# Altium PCB mux_stack_espE_64pin.PcbDoc
Units mil, origin at the board's own origin, x right, y up, seen from the top; angles counter-clockwise.
Board outline 1102.36 x 2362.2 mil, 4 copper layers (Top Layer, GND, POwer, Bottom Layer), stack 23.756 mil thick; 22 components, 91 nets, 255 pads, 117 vias.
Unrouted connection lines stored in the file: 1.
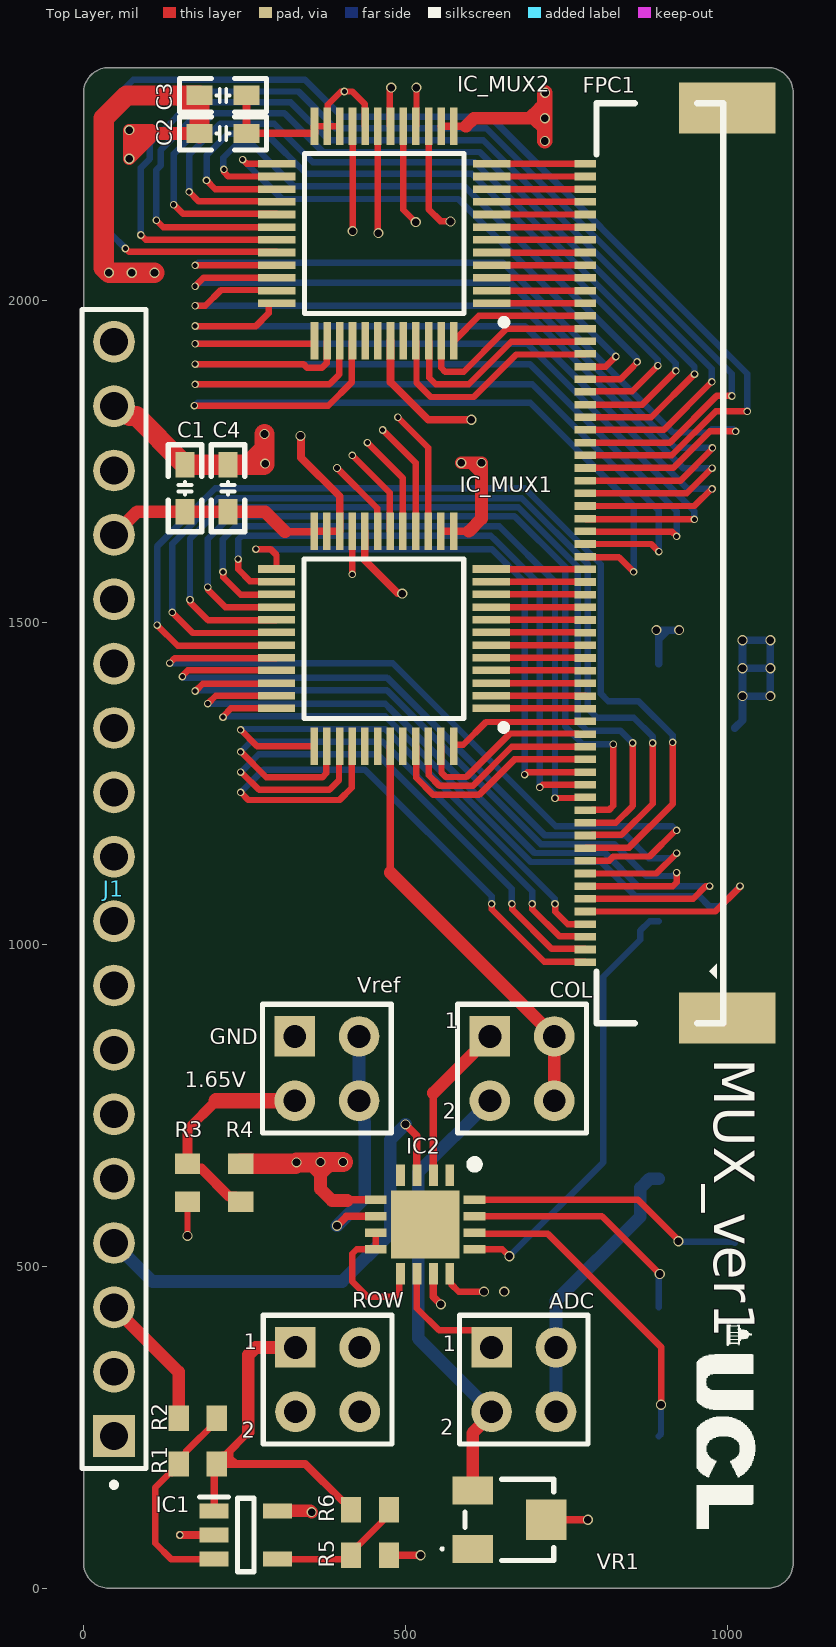
[diagram p0: Top Layer view]
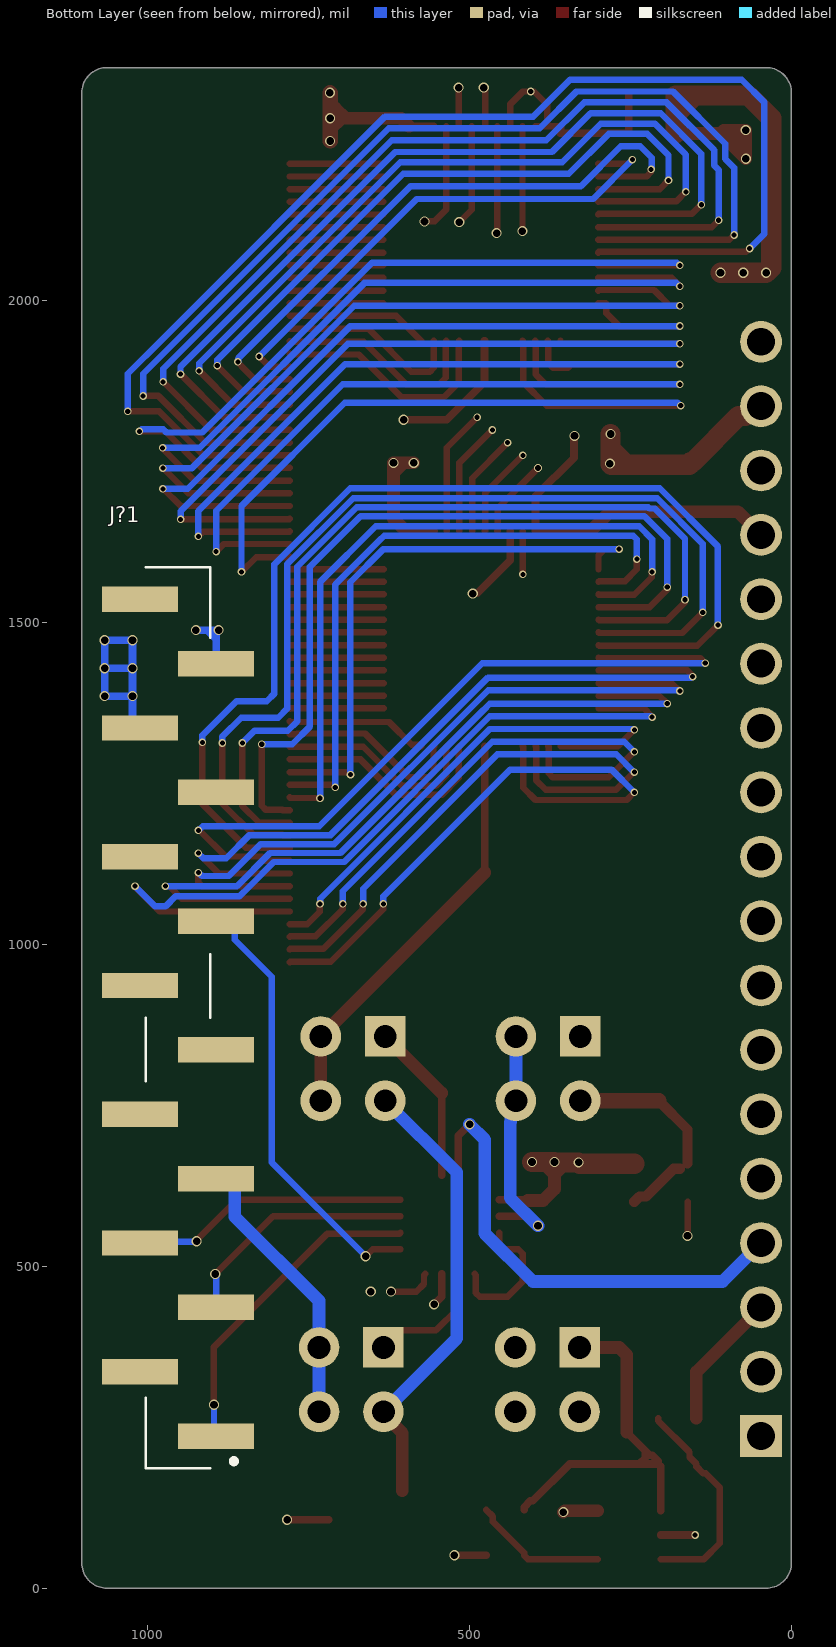
[diagram p1: Bottom Layer view, seen from below]
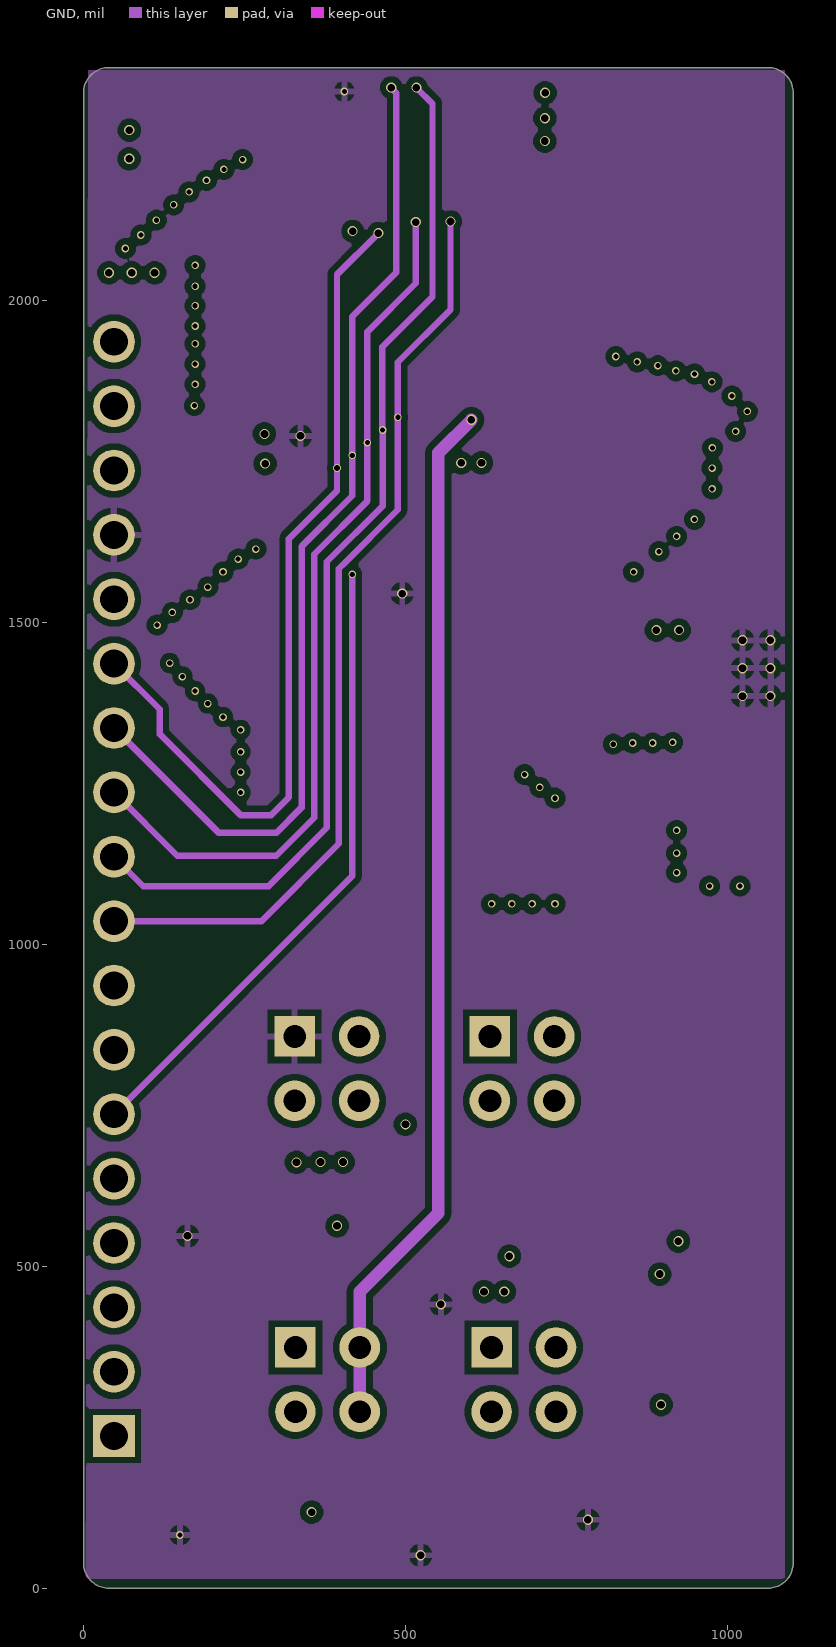
[diagram p2: GND]
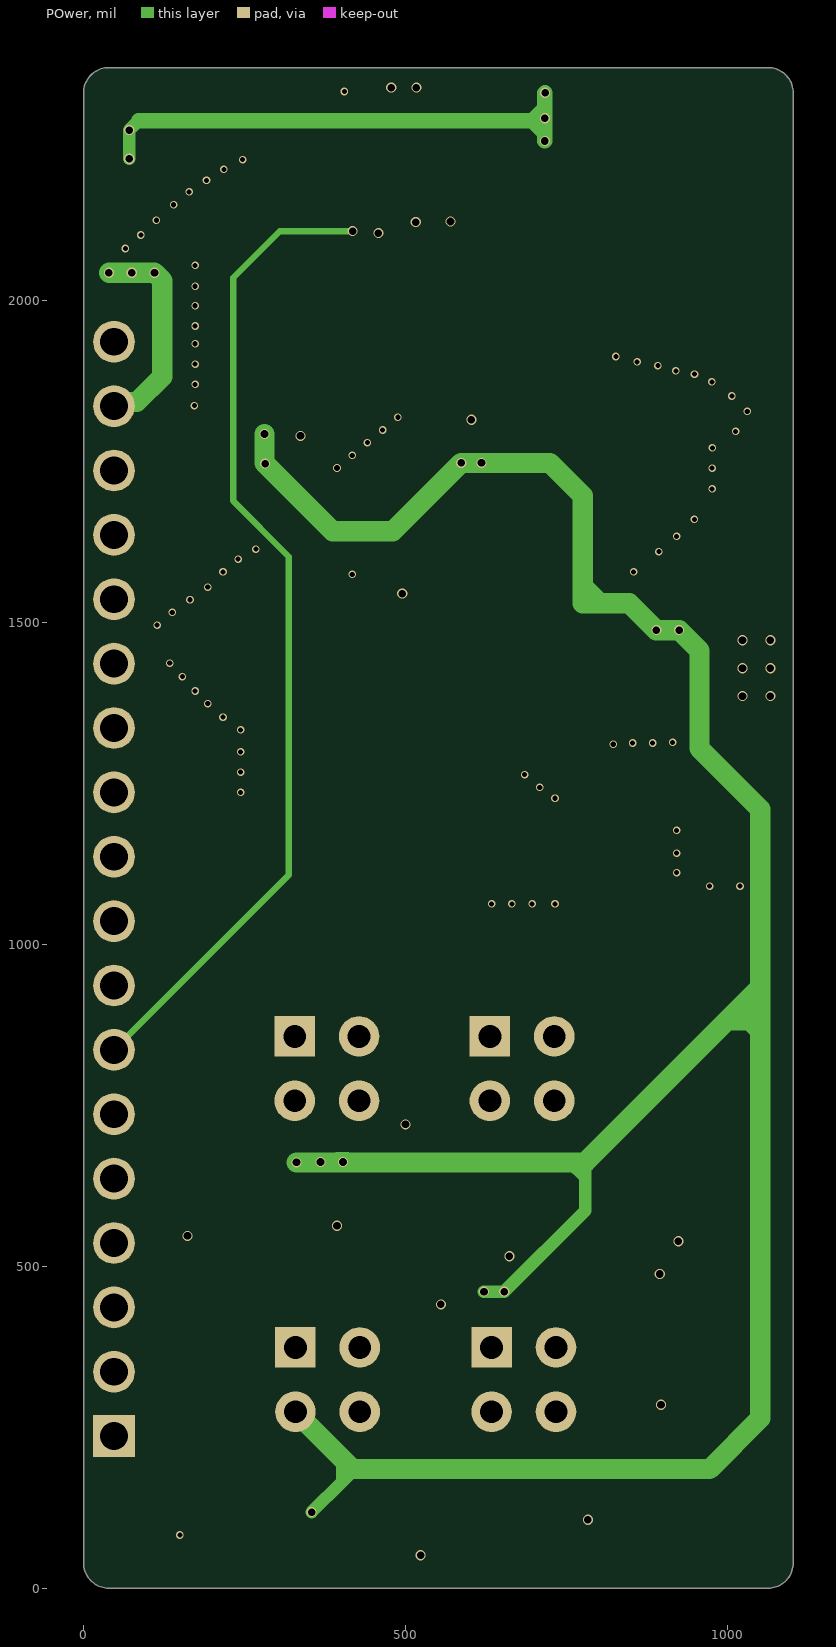
[diagram p3: POwer]

## Layer stack, top to bottom
Top Solder: solder mask 0.4, Solder Resist, Dk 3.5
Top Layer: signal copper 1.4
Dielectric 2: prepreg 2.8, PP-006, Dk 4.1
GND: signal copper 1.378
Dielectric 1: dielectric 12.6, FR-4, Dk 4.8
POwer: signal copper 1.378
Dielectric 3: prepreg 2.8, PP-006, Dk 4.1
Bottom Layer: signal copper 1.4
Bottom Solder: solder mask 0.4, Solder Resist, Dk 3.5

## Board outline
39.37,0 cw(c39.37,39.37) 0,39.37 0,2322.83 cw(c39.37,2322.83) 39.37,2362.2 1062.99,2362.2 cw(c1062.99,2322.83) 1102.36,2322.83 1102.36,39.37 cw(c1062.99,39.37) 1062.99,0

## Design rules (kind name [scope] priority, off if disabled: settings)
Clearance [All] p1: gap=10 ignorepadtopadclearanceinfootprint=FALSE except(0: Arc-Hole Track-Hole SMDPad-Hole THPad-Hole Via-Hole Fill-Hole Poly-Hole Region-Hole Text-Hole; 3.94: Arc-Arc Arc-Track Track-Track; 5: SMDPad-SMDPad; 7.87: Arc-SMDPad Track-SMDPad)
PolygonConnect [All] p1: connectstyle=Relief reliefconductorwidth=10 reliefentries=4 polygonreliefangle="90 Angle" airgapwidth=10
RoutingVias [All] p1: holewidth=28 width=50 viastyle="Through Hole" minholewidth=28 minwidth=50 maxholewidth=28 maxwidth=50
SolderMaskExpansion [All] p1: expansion=4 istentingtop=FALSE
Width [All] p1: maxlimit=78.74 minlimit=10 preferedwidth=10 minimp=50.000000 maximp=50.000000 favimp=50.000000
30 further rules are at their usual default settings.

## Classes and differential pairs
component class mux_stack_espE: C1 C2 FPC1 IC1 IC2 IC_MUX2 J1 J?1 "Left Header" R1 R4 R5 R6 "Right Header" ROW VR1 Vref

## Components (designator, comment, footprint, x,y, rotation, side; value= is the part's Value field where it differs from the comment)
ADC "Header2X2" HDR2.54-LI-2x2P 683.86,324.02 r270 top (schematic designator JP3)
C1 "0.1uF/50V(10%)" C0603_M 157.48,1708.66 r90 top (schematic designator C4)
C2 "0.1uF/50V(10%)" C0603_M 216.54,2259.84 r180 top
C3 "10uF/25V(20%)" C0603_M 216.54,2318.9 r180 top (schematic designator C1)
C4 "10uF/25V(20%)" C0603_M 224.41,1708.66 r90 top (schematic designator C3)
COL "Header2X2" HDR2.54-LI-2x2P 681.1,807.09 r270 top (schematic designator JP4)
FPC1 "8.15A0.064200" PCBComponent_1 734.53,1641.7 r270 top
IC1 "AD8615AUJZ-REEL7" SOT95P280X100-5N 251.97,82.68 r0 top
IC2 "AD8231TCPZ-EP-R7" QFN65P400X400X80-17N-D 530.51,564.96 r270 top
IC_MUX1 "ADG732BSUZ" QFP50P900X900X120-48N 466.54,1474.88 r180 top (schematic designator IC_MUX2)
IC_MUX2 "ADG732BSUZ" QFP50P900X900X120-48N 467.01,2104.33 r180 top (schematic designator IC_MUX1)
J1 "TS-118-T-A-1" SAMTEC_TS-118-T-A-1 47.24,1086.22 r90 top locked (schematic designator "Left Header")
J?1 "61001418221" 61001418221 952.76,886.22 r90 bottom locked (schematic designator J?)
R1 "Resistor 100k +/-1% 0603 100 mW" RESC1608X55X25ML10T15 177.17,192.91 r0 top value=100k
R2 "Resistor 100k +/-1% 0603 100 mW" RESC1608X55X25ML10T15 177.17,263.78 r0 top value=100k (schematic designator R4)
R3 "Resistor 1k +/-1% 0603 100 mW" RESC1608X55X25ML10T15 161.42,629.92 r90 top value=1k (schematic designator R6)
R4 "Resistor 1k +/-1% 0603 100 mW" RESC1608X55X25ML10T15 244.09,629.92 r90 top value=1k (schematic designator R5)
R5 "Resistor 100k +/-1% 0603 100 mW" RESC1608X55X25ML10T15 444.88,51.18 r0 top value=100k (schematic designator R3)
R6 "Resistor 100k +/-1% 0603 100 mW" RESC1608X55X25ML10T15 444.88,122.05 r180 top value=100k (schematic designator R2)
ROW "Header2X2" HDR2.54-LI-2x2P 379.13,324.02 r270 top (schematic designator JP2)
VR1 "3313J-1-103E" 3313J1103E 661.42,106.3 r270 top
Vref "Header2X2" HDR2.54-LI-2x2P 377.95,807.09 r270 top (schematic designator JP?)

## Footprints (in the part's own frame and the unit in brackets; to place one, negate y for a bottom-side part, rotate by r counter-clockwise, add the part's x,y. Pads: shape width x height; smd on the part's side, far side on the other; paste and mask are expansions set on the pad)
3313J1103E [mm]
  rect 1.1x1.6 smd: 1(1.15,-1.45) 3(-1.15,-1.45)
  rect 1.6x1.6 smd: 2(0,1.45)
  silkscreen extent -1.6,-2.7 1.6,1.75, body extent -1.6,-1.75 1.6,1.75, height 2.4
61001418221 [mm]
  rect 1x3 smd: 1(-16.51,-1.5) 2(-13.97,1.5) 3(-11.43,-1.5) 4(-8.89,1.5) 5(-6.35,-1.5) 6(-3.81,1.5) 7(-1.27,-1.5) 8(1.27,1.5) 9(3.81,-1.5) 10(6.35,1.5) 11(8.89,-1.5) 12(11.43,1.5) 13(13.97,-1.5) 14(16.51,1.5)
  silkscreen extent -17.78,-2.3 17.78,1.27, body extent -17.78,-2.9 17.78,2.9, height 9.4
C0603_M [mil] "无极性贴片电容"
  rect 40x30 smd: 1(-36.5,0) 2(36.5,0)
  silkscreen extent -68,-26 68,26, body extent -31,-16 31,16, height 32
HDR2.54-LI-2x2P [mm] "双排排针，2x2脚                        联系卖家 免费查找封装"
  rect 1.6x1.6 hole 0.9: 1(-1.27,-1.27)
  round 1.6 hole 0.9: 2(-1.27,1.27) 3(1.27,-1.27) 4(1.27,1.27)
  silkscreen extent -2.54,-2.54 2.54,2.54, body extent -2.54,-2.54 2.54,2.54, height 8.5
PCBComponent_1 [mm]
  rect 0.3x0.85 smd paste+0 mask+0.05: 1(16.999,1.143) 2(16.499,1.143) 3(15.999,1.143) 4(15.499,1.143) 5(14.999,1.143) 6(14.499,1.143) 7(13.999,1.143) 8(13.499,1.143) 9(12.999,1.143) 10(12.499,1.143) 11(11.999,1.143) 12(11.499,1.143) 13(10.999,1.143) 14(10.499,1.143) 15(9.999,1.143) 16(9.499,1.143) 17(8.999,1.143) 18(8.499,1.143) 19(7.999,1.143) 20(7.499,1.143) 21(6.999,1.143) 22(6.499,1.143) 23(5.999,1.143) 24(5.499,1.143) 25(4.999,1.143) 26(4.499,1.143) 27(3.999,1.143) 28(3.499,1.143) 29(2.999,1.143) 30(2.499,1.143) 31(1.999,1.143) 32(1.499,1.143) 33(0.999,1.143) 34(0.499,1.143) 35(-0.001,1.143) 36(-0.501,1.143) 37(-1.001,1.143) 38(-1.501,1.143) 39(-2.001,1.143) 40(-2.501,1.143) 41(-3.001,1.143) 42(-3.501,1.143) 43(-4.001,1.143) 44(-4.501,1.143) 45(-5.001,1.143) 46(-5.501,1.143) 47(-6.001,1.143) 48(-6.501,1.143) 49(-7.001,1.143) 50(-7.501,1.143) 51(-8.001,1.143) 52(-8.501,1.143) 53(-9.001,1.143) 54(-9.501,1.143) 55(-10.001,1.143) 56(-10.501,1.143) 57(-11.001,1.143) 58(-11.501,1.143) 59(-12.001,1.143) 60(-12.501,1.143) 61(-13.001,1.143) 62(-13.501,1.143) 63(-14.001,1.143) 64(-14.501,1.143)
  rect 2x3.81 smd paste+0 mask+0.05: 65(19.2,6.743) 66(-16.701,6.743)
  silkscreen extent -16.9,1.58 19.4,6.58
QFN65P400X400X80-17N-D [mm]
  rect 0.85x0.35 smd: 1(-1.95,0.975) 2(-1.95,0.325) 3(-1.95,-0.325) 4(-1.95,-0.975) 9(1.95,-0.975) 10(1.95,-0.325) 11(1.95,0.325) 12(1.95,0.975)
  rect 0.35x0.85 smd: 5(-0.975,-1.95) 6(-0.325,-1.95) 7(0.325,-1.95) 8(0.975,-1.95) 13(0.975,1.95) 14(0.325,1.95) 15(-0.325,1.95) 16(-0.975,1.95)
  rect 2.7x2.7 smd: 17(0,0)
  silkscreen extent -2.54,1.79 -2.21,2.11, body extent -2.05,-2.05 2.05,2.05, height 0.8
QFP50P900X900X120-48N [mm]
  rect 1.475x0.3 smd: 1(-4.238,2.75) 2(-4.238,2.25) 3(-4.238,1.75) 4(-4.238,1.25) 5(-4.238,0.75) 6(-4.238,0.25) 7(-4.238,-0.25) 8(-4.238,-0.75) 9(-4.238,-1.25) 10(-4.238,-1.75) 11(-4.238,-2.25) 12(-4.238,-2.75) 25(4.238,-2.75) 26(4.238,-2.25) 27(4.238,-1.75) 28(4.238,-1.25) 29(4.238,-0.75) 30(4.238,-0.25) 31(4.238,0.25) 32(4.238,0.75) 33(4.238,1.25) 34(4.238,1.75) 35(4.238,2.25) 36(4.238,2.75)
  rect 0.3x1.475 smd: 13(-2.75,-4.238) 14(-2.25,-4.238) 15(-1.75,-4.238) 16(-1.25,-4.238) 17(-0.75,-4.238) 18(-0.25,-4.238) 19(0.25,-4.238) 20(0.75,-4.238) 21(1.25,-4.238) 22(1.75,-4.238) 23(2.25,-4.238) 24(2.75,-4.238) 37(2.75,4.238) 38(2.25,4.238) 39(1.75,4.238) 40(1.25,4.238) 41(0.75,4.238) 42(0.25,4.238) 43(-0.25,4.238) 44(-0.75,4.238) 45(-1.25,4.238) 46(-1.75,4.238) 47(-2.25,4.238) 48(-2.75,4.238)
  silkscreen extent -4.85,-3.15 3.15,3.62
RESC1608X55X25ML10T15 [mm] "Chip Resistor, 2-Leads, Body 1.70x0.90mm, IPC Low Density"
  rect 0.8x1 smd: 1(-0.75,0) 2(0.75,0)
  body extent -0.85,-0.45 0.85,0.45, height 0.55
SAMTEC_TS-118-T-A-1 [mm]
  rect 1.65x1.65 hole 1.1: 01(-21.59,0)
  round 1.65 hole 1.1: 02(-19.05,0) 03(-16.51,0) 04(-13.97,0) 05(-11.43,0) 06(-8.89,0) 07(-6.35,0) 08(-3.81,0) 09(-1.27,0) 10(1.27,0) 11(3.81,0) 12(6.35,0) 13(8.89,0) 14(11.43,0) 15(13.97,0) 16(16.51,0) 17(19.05,0) 18(21.59,0)
  silkscreen extent -23.61,-1.27 22.86,1.27
SOT95P280X100-5N [mm]
  rect 1.15x0.6 smd: 1(-1.25,0.95) 2(-1.25,0) 3(-1.25,-0.95) 4(1.25,-0.95) 5(1.25,0.95)
  silkscreen extent -1.83,-1.45 0.33,1.5, body extent -1.4,-1.45 1.4,1.45, height 1

## Part data
ADC COL ROW Vref: library part "Header 2X2", "2*2P接插件", BOM名称=2*2P接插件, 版权归属="封装库来自淘宝 ID：黄晶宝石"
C1 C2 C3 C4: library part C, "贴片电容/MLCC电容", BOM名称=无极性贴片电容, 当前库版本V2024.2.3 @淘宝卖家:黄晶宝石=最新版本发布https://item.taobao.com/item.htm?id=566775463719, 联系下单店铺卖家 免费帮你查找封装="联系下单店铺卖家 免费技术指导"
FPC1: JLCPCB Part Class="Extended Part", LCSC Part Name="翻盖式 下接 P数:64P 间距:0.5mm", Manufacturer=DIANWEI(钿威科技), Add into BOM=yes, Contact Plating=Gold, Contact Type="Bottom Contact", Convert to PCB=yes, Datasheet=https://atta.szlcsc.com/upload/public/pdf/source/20240226/9B0E964ABAD9EBDCC7FF6472C3CD9B36.pdf, Device=8.15A0.064200, Height Above Board=1.8mm, Locking Feature=Clamshell, Manufacturer Part=8.15A0.064200, Number of Contacts=64P, Pitch=0.5mm, Supplier=LCSC, Supplier Footprint=SMD,P=0.5mm,卧贴, Supplier Part=C20626047, Symbol=8.15A0.064200
IC1: "Integrated Circuit", Manufacturer_Name="Analog Devices", Mouser Part Number=584-AD8615AUJZ-R7, Arrow Part Number=AD8615AUJZ-REEL7, Arrow Price/Stock=https://www.arrow.com/en/products/ad8615aujz-reel7/analog-devices?utm_currency=USD&region=europe, Datasheet Link=http://www.farnell.com/datasheets/1841629.pdf, Height=1mm, Manufacturer_Part_Number=AD8615AUJZ-REEL7, Mouser Price/Stock=https://www.mouser.co.uk/ProductDetail/Analog-Devices/AD8615AUJZ-REEL7?qs=%2FtpEQrCGXCyHRrprFEn%2Fog%3D%3D
IC2: "Integrated Circuit", Manufacturer_Name="Analog Devices", Mouser Part Number=584-AD8231TCPZ-EP-R7, Arrow Part Number=AD8231TCPZ-EP-R7, Arrow Price/Stock=https://www.arrow.com/en/products/ad8231tcpz-ep-r7/analog-devices?region=nac, Datasheet Link=https://www.analog.com/media/en/technical-documentation/data-sheets/AD8231-EP.pdf, Height=0.8mm, Manufacturer_Part_Number=AD8231TCPZ-EP-R7, Mouser Price/Stock=https://www.mouser.co.uk/ProductDetail/Analog-Devices/AD8231TCPZ-EP-R7?qs=%2FtpEQrCGXCwVvPTzyZftPQ%3D%3D
IC_MUX1 IC_MUX2: "Integrated Circuit", Manufacturer_Name="Analog Devices", Mouser Part Number=584-ADG732BSUZ, Arrow Part Number=ADG732BSUZ, Arrow Price/Stock=https://www.arrow.com/en/products/adg732bsuz/analog-devices?region=europe, Datasheet Link=https://datasheet.datasheetarchive.com/originals/distributors/Datasheets-4/DSA-69835.pdf, Height=1.2mm, Manufacturer_Part_Number=ADG732BSUZ, Mouser Price/Stock=https://www.mouser.co.uk/ProductDetail/Analog-Devices/ADG732BSUZ?qs=BpaRKvA4VqFZhnJK9M1XMA%3D%3D
J1: library part CMP-002-00076-1, "HEADER, 2.54MM, THOUGH HOLE VERTICAL, 18 POSITION; Connector Systems:Board-to-Board; Pitch Spacing:2.54mm; No. of Rows:1Rows; No. of Contacts:18Contacts; Contact Termination Type:Through Hole; Product Range:TS Series; Gender:Header RoHS Compliant: Yes", Case/Package=None, Availability="In Stock", Check_prices=https://www.snapeda.com/parts/TS-118-T-A-1/Samtec/view-part/?ref=eda, Component Type=Standard, Design Item ID=TS-118-T-A-1, MF=Samtec, MP=TS-118-T-A-1, Pins=18, Price=None, Purchase-URL=https://pricing.snapeda.com/search/part/TS-118-T-A-1/?ref=eda, SnapEDA_Link=https://www.snapeda.com/parts/TS-118-T-A-1/Samtec/view-part/?ref=snap, Source=TS-118-T-A-1.SchLib
J?1: "Connector", Manufacturer_Name="Wurth Elektronik", Mouser Part Number=710-61001418221, Datasheet Link=https://componentsearchengine.com/Datasheets/1/61001418221.pdf, Height=9.3mm, Manufacturer_Part_Number=61001418221, Mouser Price/Stock=https://www.mouser.co.uk/ProductDetail/Wurth-Elektronik/61001418221?qs=PhR8RmCirEZbaE9NVx%2FAsQ%3D%3D
R1 R2 R5 R6: library part CMP-009-00023-5, "Chip Resistor, 100 KOhm, +/- 1%, 0.1 W, -55 to 155 degC, 0603 (1608 Metric)", Case/Package=0603, Max Operating Temperature=155°C, Min Operating Temperature=-55°C, Power=100mW, Tolerance=1%, Voltage Rating=50V, Mounting Technology=SM, Pins=2, RoHS Compliant=True
R3 R4: library part CMP-009-00014-5, "Chip Resistor, 1 KOhm, +/-1%, 0.1 W, -55 to 155 degC, 0603 (1608 Metric)", Case/Package=0603, Max Operating Temperature=155°C, Min Operating Temperature=-55°C, Power=100mW, Tolerance=1%, Voltage Rating=50V, Mounting Technology=SM, Pins=2, RoHS Compliant=True
VR1: "Variable Resistor", Manufacturer_Name=Bourns, Mouser Part Number=652-3313J-1-103E, Arrow Part Number=3313J-1-103E, Arrow Price/Stock=https://www.arrow.com/en/products/3313j-1-103e/bourns?region=nac, Datasheet Link=https://www.bourns.com/docs/Product-Datasheets/3313.pdf, Height=2.4mm, Manufacturer_Part_Number=3313J-1-103E, Mouser Price/Stock=https://www.mouser.co.uk/ProductDetail/Bourns/3313J-1-103E?qs=oM%2FE6%2FUWOpSJWTaqAX%252Bm%2Fw%3D%3D

## Via types
v1: diameter 11.81, hole 7.87, Top Layer to Bottom Layer, 71 vias
v2: diameter 15.75, hole 11.81, Top Layer to Bottom Layer, 45 vias
v3: diameter 11.81, hole 9.84, Top Layer to Bottom Layer, 1 vias

## Nets (pads, with @x,y where several pads share a name; then routed paths per layer and width w, separated by ;. In a path a pad name is that pad's centre, name@x,y a point inside that pad or via, vN(x,y) a via of type N, cw(c..) or ccw(c..) an arc to the next point about the centre after c; other vN are vias at no path point)
1.65V: R3.2 R4.1 Vref.3 | length 330.2
  Top Layer w15.75: R3.2 161.42,712.6 205.91,757.09 ; R3.2@173.23,651.57 183.07,651.57 226.38,608.27 236.22,608.27 R4.1
  Top Layer w23.62: 205.91,757.09 Vref.3
3.3V: C1.2 C2.2 C3.2 C4.2 IC1.5 IC2.5 IC2.12 IC_MUX1.13 IC_MUX1.14 IC_MUX2.13 IC_MUX2.14 J1.17 J?1.13 R4.2 ROW.3 | length 7880.8
  Top Layer w10: IC2.12 570.79,486.3 570.79,472.52 582.68,460.63 v2(622.05,460.63)
  Top Layer w11.81: 409.45,602.36 410.43,603.35 IC2.5 ; IC_MUX1.14 IC_MUX1.13 598.43,1641.73 ; IC_MUX2.14 IC_MUX2.13 594.02,2271.18
  Top Layer w19.68: v2(70.87,2220.47) 110.24,2259.84 C2.2 ; v2@71,2220.61 v2(71,2265) ; 90.55,2245.45 v2(71,2265) ; 105.08,2265 v2(71,2265) ; IC1.5 352.36,120.08 v2(354.33,118.11) ; 349.06,661.42 368,642.48 387,661.48 387,662 ; v2(368,662) 368,620.19 385.83,602.36 409.45,602.36 ; v2(586.61,1748.03) v2(618.11,1748.03) 618.11,1661.42 598.43,1641.73 ; 594.02,2271.18 606.3,2283.46 v2(716.54,2283.46) ; 602.36,1748.03 618.11,1732.28 ; 693,2283.46 708.75,2299.21 716.54,2299.21 ; 698.82,2283.46 716.54,2265.75
  Top Layer w23.62: v2(716.54,2248.03) v2(716.54,2283.46) 716.54,2314.96 716.54,2322.54 v2(717,2323)
  Top Layer w31.5: J1.17 56.3,1836.22 71.59,1820.93 81.71,1820.93 153.23,1749.41 156.73,1749.41 157.48,1748.67 157.48,1745.91 158.23,1745.16 C4.2 280.16,1745.16 281,1746 v2(281,1793) ; v2(110.24,2043.31) v2(74.8,2043.31) v2(39.37,2043.31) 31.5,2051.18 31.5,2263.78 31.5,2283.5 66.9,2318.9 86.61,2318.9 118.11,2318.9 C3.2 C2.2 ; 150.51,2318.9 180.04,2289.37 ; R4.2 v2@328.74,659.45 ; 260,1748.5 281,1769.5 ; v2(330.71,661.42) 367.42,661.42 v2(368,662) v2(403,662)
  POwer w19.68: v2@71,2220.61 v2(71,2265) 85.53,2279.53 ; v2(354.33,118.11) 401.97,165.75 ; 401.97,201.18 401.97,165.75 ; 418.11,185.04 418.11,181.89 401.97,165.75 ; v2(622.05,460.63) v2(653.54,460.63) 779.53,586.61 779.53,637.8 ; 755.91,661.42 779.53,637.8 ; 779.53,661.42 779.53,637.8
  POwer w23.62: 85.53,2279.53 200.79,2279.53 716.54,2279.53 v2(716.54,2248.03) ; 716.54,2263.78 712.6,2263.78 696.85,2279.53 716.54,2299.21 ; v2(716.54,2283.46) 716.54,2314.96 716.54,2322.54 v2(717,2323)
  POwer w31.5: v2(39.37,2043.31) v2(74.8,2043.31) v2(110.24,2043.31) 122.05,2031.5 122.05,1881.89 82.78,1842.62 53.65,1842.62 J1.17 ; v2(281,1793) 281,1748 v2(282,1747) 387.27,1641.73 405.51,1641.73 480.32,1641.73 v2(586.61,1748.03) v2(618.11,1748.03) 724.41,1748.03 775.59,1696.85 775.59,1530.1 847.85,1530.1 v2(889.76,1488.19) v2(925.2,1488.19) 956.69,1456.69 956.69,1304.61 1051.34,1209.96 1051.34,933.23 ; ROW.3 418.11,185.04 972.44,185.04 1051.34,263.94 1051.34,933.23 ; v2(330.71,661.42) 362.2,661.42 393.7,661.42 ; v2@401.64,662 394.28,662 ; v2(403,662) 394.28,662 ; v2@409,662 394.28,662 ; 775.59,1556.51 802,1530.1 ; 1000,881.89 1035.59,881.89 ; 1019.84,897.64 1051.34,866.14 ; 393.7,661.42 779.53,661.42 1051.34,933.23 ; 393.7,661.42 394.28,662
  Bottom Layer w11.81: J?1.13 893.7,1483.19 889.76,1487.12 v2(889.76,1488.19) v2(925.2,1488.19) ; 893.7,1476.38 895.67,1476.38 907.48,1488.19
A0: IC_MUX1.15 IC_MUX2.15 J1.09 | length 1805.4
  Top Layer w10: v1(488.19,1818.9) 535.43,1771.65 IC_MUX1.15 ; IC_MUX2.15 535.91,2142.09 554.33,2123.67 569.33,2123.67 v2(570,2123)
  GND w10: J1.09 276.38,1036.22 396.42,1156.26 396.42,1583.46 406.3,1593.34 488.19,1675.23 v1(488.19,1818.9) 488.19,1904.19 570,1986 v2(570,2123)
A1: IC_MUX1.16 IC_MUX2.16 J1.10 | length 1854.1
  Top Layer w10: v1(464.57,1799.21) 515.75,1748.03 IC_MUX1.16 ; IC_MUX2.16 517.13,2272.09 517.13,2330.87 v2(517,2331)
  GND w10: J1.10 92.91,1090.55 287.4,1090.55 377.95,1181.1 377.95,1594.49 464.57,1681.1 v1@464.57,1798.72 ; v1(464.57,1799.21) 464.57,1799.7 464.17,1800.1 464.17,1928.17 542,2006 542,2306 v2(517,2331)
A2: IC_MUX1.17 IC_MUX2.17 J1.11 | length 1684.1
  Top Layer w10: v1(440.94,1779.53) 496.06,1724.41 IC_MUX1.17 ; IC_MUX2.17 496.54,2141.46 v2(516,2122)
  GND w10: J1.11 145.67,1137.8 299.21,1137.8 358.27,1196.85 358.27,1606.3 440.94,1688.98 v1(440.94,1779.53) ; v1@440.94,1780.02 440.94,1951.94 516,2027 v2(516,2122)
A3: IC_MUX1.18 IC_MUX2.18 J1.12 | length 1761.1
  Top Layer w10: v1(417.32,1759.84) 475.47,1701.69 475.47,1642.64 IC_MUX1.18 ; IC_MUX2.18 475.94,2272.09 475.94,2327.39 478,2329.44 v2(478,2331)
  GND w10: J1.12 210.24,1173.23 299.21,1173.23 338.58,1212.6 338.58,1618.11 417.32,1696.85 v1(417.32,1759.84) ; v1@417.32,1760.33 417.32,1975.32 486,2044 486,2322.27 478,2330.27 v2(478,2331)
A4: IC_MUX1.19 IC_MUX2.19 J1.13 | length 1627.8
  Top Layer w10: v3(393.7,1740.16) 456.33,1677.53 456.33,1642.09 IC_MUX1.19 ; IC_MUX2.19 457.17,2105.83 v2(458,2105)
  GND w10: J1.13 118.11,1365.35 118.11,1326.77 243.89,1200.99 291.54,1200.99 318.87,1228.32 318.87,1629.9 393.7,1704.72 v3(393.7,1740.16) ; v3@393.7,1740.65 393.7,2040.7 v2(458,2105)
ADC_Channel_0: ADC.2 ADC.4 J?1.5 | length 436.7
  Bottom Layer w19.68: ADC.4 ADC.2 733.86,446.46 864.87,577.47 864.87,621.54 879.56,636.22 J?1.5
DAC1: J1.03 R2.1 | length 214
  Top Layer w19.68: J1.03 147.64,335.83 R2.1
DAC2: IC2.3 J1.04 | length 750.1
  Top Layer w11.81: v2(500,720.47) 517.72,702.76 IC2.3
  Bottom Layer w19.68: J1.04 107.09,476.38 401.57,476.38 476.38,551.18 476.38,696.85 v2(500,720.47)
GND: C1.1 C2.1 C3.1 C4.1 IC1.2 IC2.11 IC_MUX1.20 IC_MUX1.22 IC_MUX1.23 IC_MUX1.24 IC_MUX2.20 IC_MUX2.22 IC_MUX2.23 IC_MUX2.24 J1.15 J?1.12 R3.1 R5.2 VR1.2 Vref.1 | length 1665.1
  Top Layer w10: v2(161.42,547.24) R3.1 ; IC_MUX2.24 IC_MUX2.23 ; IC_MUX2.23@377.95,2271.65 IC_MUX2.23 ; IC_MUX2.22 IC_MUX2.23 ; IC_MUX2.20 436.57,2272.09 436.57,2305.55 417.12,2325 v1(405,2325) 404.65,2324.65 399.65,2324.65 379.33,2304.33 379.33,2272.09 IC_MUX2.23
  Top Layer w11.81: v1(149.61,82.68) IC1.2 ; C3.1 C2.1 358.74,2259.84 IC_MUX2.24 ; 313,1641 358.27,1641 IC_MUX1.24 IC_MUX1.23 IC_MUX1.22 397.64,1696.36 337.75,1756.25 337.75,1789.25 v2(337,1790) ; IC_MUX1.20 437.01,1596.99 488.25,1545.75 494.25,1545.75 v2(495,1545) ; R5.2 v2(523.62,51.18) ; IC2.11 543.31,452.76 v2(555.12,440.94) ; VR1.2 v2(783.46,106.3)
  Top Layer w19.68: J1.15@47.26,1636.22 83.2,1672.16 C1.1 C4.1 281.84,1672.16 313,1641
  Bottom Layer w11.81: J?1.12 1023.62,1348.03 v2(1023.62,1385.83) ; v2(1023.62,1385.83) v2(1066.93,1385.83) v2(1066.93,1429.13) ; v2(1023.62,1385.83) v2(1023.62,1429.13) ; v2(1023.62,1429.13) v2(1023.62,1472.44) v2(1066.93,1472.44) v2(1066.93,1429.13) ; v2(1023.62,1429.13) v2(1066.93,1429.13)
IA_A0: IC2.14 J?1.1 | length 503.6
  Top Layer w10: IC2.14 609.17,550.28 721.38,550.28 897.64,374.02 897.64,285.64 v2(897,285)
  Bottom Layer w10: J?1.1 897,239.52 v2(897,285)
IA_A1: IC2.15 J?1.3 | length 377.2
  Top Layer w10: IC2.15 805.24,577.76 v2(895,488)
  Bottom Layer w10: J?1.3 893.7,485.15 895,486.44 v2(895,488)
IA_A2: IC2.16 J?1.4 | length 433.2
  Top Layer w10: IC2.16 861.22,603.35 921.13,543.44 924,540.56 v2(924,539)
  Bottom Layer w10: v2(924,539) 925,538 1010.03,538 J?1.4
IA_CS: IC2.13 J?1.9 | length 683.6
  Top Layer w10: IC2.13 650.59,526.57 v2(661.42,515.75)
  Bottom Layer w10: v2(661.42,515.75) 807.09,661.42 807.09,949.61 864.87,1007.39 864.87,1021.54 879.56,1036.22 J?1.9
Iout: IC1.1 R1.2 R6.2 ROW.1 | length 609.4
  Top Layer w11.81: IC1.1 202.76,188.98 R1.2 ; 227.36,213.58 227.36,201.77 236.22,192.91 ; 255.91,242.13 220.47,206.69 216.54,206.69 206.69,196.85 R1.2 ; R6.2 415.35,125.98 405.51,135.83 401.57,135.83 344.49,192.91 R1.2
  Top Layer w19.68: 255.91,242.13 255.91,362.48 267.44,374.02 ROW.1
MUX_COL_OUT: COL.2 COL.4 IC_MUX1.43 | length 656.5
  Top Layer w11.81: 476.38,1111.81 IC_MUX1.43
  Top Layer w19.68: 476.38,1111.81 COL.2 COL.4
MUX_COL_OUT_1: COL.1 IC2.2 | length 251.7
  Top Layer w11.81: IC2.2 543.31,769.29
  Top Layer w19.68: 543.31,769.29 COL.1
MUX_COL_OUT_2: ADC.3 COL.3 VR1.3 | length 711.2
  Top Layer w19.68: VR1.3 604.33,240.83 633.86,270.36 ADC.3
  Bottom Layer w19.68: COL.3 519.68,645.67 519.68,388.19 ADC.3
MUX_COL_S1: FPC1.32 IC_MUX1.12 | length 146.3
  Top Layer w10: IC_MUX1.12 779.06,1583.15 FPC1.32
MUX_COL_S2: FPC1.31 IC_MUX1.11 | length 146.3
  Top Layer w10: IC_MUX1.11 779.06,1563.46 FPC1.31
MUX_COL_S3: FPC1.30 IC_MUX1.10 | length 146.3
  Top Layer w10: IC_MUX1.10 779.06,1543.78 FPC1.30
MUX_COL_S4: FPC1.29 IC_MUX1.9 | length 146.3
  Top Layer w10: IC_MUX1.9 779.06,1524.09 FPC1.29
MUX_COL_S5: FPC1.28 IC_MUX1.8 | length 146.3
  Top Layer w10: IC_MUX1.8 779.06,1504.41 FPC1.28
MUX_COL_S6: FPC1.27 IC_MUX1.7 | length 146.3
  Top Layer w10: IC_MUX1.7 779.06,1484.72 FPC1.27
MUX_COL_S7: FPC1.26 IC_MUX1.6 | length 146.3
  Top Layer w10: IC_MUX1.6 779.06,1465.04 FPC1.26
MUX_COL_S8: FPC1.25 IC_MUX1.5 | length 146.3
  Top Layer w10: IC_MUX1.5 779.06,1445.35 FPC1.25
MUX_COL_S9: FPC1.24 IC_MUX1.4 | length 146.3
  Top Layer w10: IC_MUX1.4 779.06,1425.67 FPC1.24
MUX_COL_S10: FPC1.23 IC_MUX1.3 | length 146.3
  Top Layer w10: IC_MUX1.3 779.06,1405.98 FPC1.23
MUX_COL_S11: FPC1.22 IC_MUX1.2 | length 146.3
  Top Layer w10: IC_MUX1.2 779.06,1386.3 FPC1.22
MUX_COL_S12: FPC1.21 IC_MUX1.1 | length 146.3
  Top Layer w10: IC_MUX1.1 779.06,1366.61 FPC1.21
MUX_COL_S13: FPC1.20 IC_MUX1.48 | length 221.5
  Top Layer w10: IC_MUX1.48 574.8,1309.42 575.71,1310.32 589.85,1310.32 625.09,1345.56 778.63,1345.56 FPC1.20
MUX_COL_S14: FPC1.19 IC_MUX1.47 | length 296.2
  Top Layer w10: IC_MUX1.47 556.02,1307.13 556.02,1266.84 562.7,1260.16 594.8,1260.16 662.32,1327.68 767.8,1327.68 768.7,1326.78 FPC1.19
MUX_COL_S15: FPC1.18 IC_MUX1.46 | length 320.8
  Top Layer w10: IC_MUX1.46 536.34,1307.13 536.34,1262.87 552.99,1246.22 604.49,1246.22 665.36,1307.09 FPC1.18
MUX_COL_S16: FPC1.17 IC_MUX1.45 | length 346.2
  Top Layer w10: IC_MUX1.45 516.65,1307.13 516.65,1258.94 543.31,1232.28 614.17,1232.28 669.3,1287.41 FPC1.17
MUX_COL_S17: FPC1.16 IC_MUX1.25 | length 891.7
  Top Layer w10: v1(267.72,1614.17) 290.38,1614.17 299.68,1604.86 IC_MUX1.25 ; v1(685.04,1263.78) 685.53,1263.78 689.47,1267.72 FPC1.16
  Bottom Layer w10: v1(267.72,1614.17) 633.86,1614.17 685.39,1562.65 685.39,1264.13 v1(685.04,1263.78)
MUX_COL_S18: FPC1.15 IC_MUX1.26 | length 1003.9
  Top Layer w10: v1(240.16,1598.43) 240.16,1582.68 258.46,1564.37 298.78,1564.37 IC_MUX1.26 ; v1(708.66,1244.09) 709.15,1244.09 713.1,1248.04 FPC1.15
  Bottom Layer w10: v1(240.16,1598.43) 240.16,1629.22 246.02,1635.08 632.64,1635.08 639.61,1628.11 ; 639.63,1628.11 708.66,1559.08 v1(708.66,1244.09)
MUX_COL_S19: FPC1.14 IC_MUX1.27 | length 1097.2
  Top Layer w10: v1(216.54,1578.74) 216.88,1578.39 216.88,1570.52 243.98,1543.42 299.32,1543.42 IC_MUX1.27 ; v1(732.28,1227.13) 732.6,1227.45 778.63,1227.45 FPC1.14
  Bottom Layer w10: v1(216.54,1578.74) 216.19,1579.09 216.19,1629.16 236.63,1649.61 645.67,1649.61 732.28,1562.99 v1(732.28,1227.13)
MUX_COL_S20: FPC1.13 IC_MUX1.28 | length 1275.1
  Top Layer w10: v1(192.91,1555.12) 193.26,1554.77 193.26,1550.83 220,1524.09 IC_MUX1.28 ; FPC1.13 790.36,1208.67 791.26,1209.57 816.98,1209.57 822.83,1215.43 v1(822.83,1311.02)
  Bottom Layer w10: v1(192.91,1555.12) 192.91,1629.92 228.35,1665.35 669.32,1665.35 748.03,1586.64 748.03,1338.58 775.59,1311.02 v1(822.83,1311.02)
MUX_COL_S21: FPC1.12 IC_MUX1.29 | length 1426.9
  Top Layer w10: v1(165.35,1535.43) 165.7,1535.09 165.7,1531.15 193.35,1503.5 298.78,1503.5 IC_MUX1.29 ; FPC1.12 779.64,1189.09 826.89,1189.09 853,1215.2 v1(853,1313)
  Bottom Layer w10: v1(165.35,1535.43) 165.35,1629.97 212.55,1677.17 220.45,1677.17 222.57,1679.29 675.09,1679.29 767.72,1586.66 767.72,1346.46 782.24,1331.93 834.07,1331.93 v1@852.65,1313.35
MUX_COL_S22: FPC1.11 IC_MUX1.30 | length 1571.6
  Top Layer w10: v1(137.8,1515.75) 169.72,1483.82 298.78,1483.82 IC_MUX1.30 ; FPC1.11 790.36,1169.3 791.26,1170.2 835.55,1170.2 884,1218.65 v1(884,1313)
  Bottom Layer w10: v1(137.8,1515.75) 137.8,1622.12 208.59,1692.91 216.49,1692.91 216.8,1693.23 680.86,1693.23 783.46,1590.63 783.46,1366.14 797.4,1352.2 854.8,1352.2 884,1323 v1(884,1313)
MUX_COL_S23: FPC1.10 IC_MUX1.31 | length 1706.9
  Top Layer w10: v1(114.17,1496.06) 146.1,1464.13 298.78,1464.13 IC_MUX1.31 ; FPC1.10 780.43,1150.51 796,1150.51 847.39,1150.52 915,1218.12 v1(915,1314)
  Bottom Layer w10: v1(114.17,1496.06) 114.17,1618.21 204.63,1708.66 685.14,1708.66 803.15,1590.65 803.15,1389.76 814.96,1377.95 862.05,1377.95 915,1325 v1(915,1314)
MUX_COL_S24: FPC1.9 IC_MUX1.32 | length 1225.1
  Top Layer w10: v1(133.86,1437.01) 141.3,1444.45 298.78,1444.45 IC_MUX1.32 ; FPC1.9 816.28,1129.92 822.94,1136.58 878.97,1136.58 919.2,1176.82 920.91,1176.82 v1(921.26,1177.17)
  Bottom Layer w10: v1@134.35,1437.01 480.32,1437.01 733.5,1183.82 749.25,1183.82 914.5,1183.82 921.15,1177.17 v1(921.26,1177.17)
MUX_COL_S25: FPC1.8 IC_MUX1.33 | length 1193.5
  Top Layer w10: v1(153.54,1416.1) 153.89,1416.45 153.89,1417.67 161.89,1425.67 IC_MUX1.33 ; FPC1.8 889.77,1110.24 v1(921.26,1141.73)
  Bottom Layer w10: v1(153.54,1416.1) 154.03,1416.1 154.94,1415.2 155.73,1415.2 156.32,1414.61 471.25,1414.61 715.97,1169.88 743.48,1169.88 755.02,1169.88 841.93,1169.88 877.95,1133.86 913.39,1133.86 v1(921.26,1141.73)
MUX_COL_S26: FPC1.7 IC_MUX1.34 | length 1161
  Top Layer w10: v1(173.23,1393.7) 173.72,1393.7 185.1,1405.08 298.78,1405.08 IC_MUX1.34 ; FPC1.7 915.4,1090.55 921.26,1096.41 v1(921.26,1111.46)
  Bottom Layer w10: v1(173.23,1393.7) 173.72,1393.7 174.94,1394.92 471.22,1394.92 710.2,1155.95 824.37,1155.95 874.02,1106.3 915.61,1106.3 920.77,1111.46 v1(921.26,1111.46)
MUX_COL_S27: FPC1.6 IC_MUX1.35 | length 1209
  Top Layer w10: v1@193.26,1374.36 205.2,1386.3 IC_MUX1.35 ; FPC1.6 946.9,1070.87 966.23,1090.2 972.09,1090.2 v1(972.44,1090.55)
  Bottom Layer w10: v1(192.91,1374.02) 468.5,1374.02 478.19,1364.33 700.54,1142.01 809.91,1142.01 861.37,1090.55 927.55,1090.55 927.71,1090.38 945.03,1090.38 945.2,1090.55 v1@971.95,1090.55
MUX_COL_S28: FPC1.5 IC_MUX1.36 | length 1285.6
  Top Layer w10: v1(216.54,1353.11) 216.88,1353.46 216.88,1354.68 228.82,1366.61 IC_MUX1.36 ; FPC1.5 981.43,1051.19 1018.78,1088.54 1018.78,1089.16 1019.68,1090.06 v1(1019.68,1090.55)
  Bottom Layer w10: v1(216.54,1353.11) 217.03,1353.11 218.25,1354.33 468.48,1354.33 472.42,1350.39 ; 472.44,1350.39 694.76,1128.07 804.14,1128.07 841.66,1090.55 857.41,1074.8 956.69,1074.8 972.44,1059.06 988.19,1059.06 v1(1019.68,1090.55)
MUX_COL_S29: FPC1.4 IC_MUX1.37 | length 797.7
  Top Layer w10: v1(244.09,1333.43) 269.49,1308.03 IC_MUX1.37 ; v1(732.28,1062.99) 732.63,1062.65 732.63,1050.83 751.97,1031.5 FPC1.4
  Bottom Layer w10: v1(244.09,1333.43) 244.58,1333.43 245.81,1334.65 468.48,1334.65 731.94,1071.19 731.94,1063.34 v1(732.28,1062.99)
MUX_COL_S30: FPC1.3 IC_MUX1.38 | length 877.1
  Top Layer w10: v1@244.56,1299.21 283.93,1259.84 285.82,1259.84 371.19,1259.84 377.05,1265.7 377.05,1307.13 IC_MUX1.38 ; v1(696.85,1062.99) 697.2,1062.65 697.2,1054.77 739.25,1012.72 778.63,1012.72 FPC1.3
  Bottom Layer w10: v1(244.09,1299.21) 259.84,1314.96 464.54,1314.96 696.85,1082.65 v1@696.85,1063.48
MUX_COL_S31: FPC1.2 IC_MUX1.39 | length 913.8
  Top Layer w10: v1@244.93,1267.72 244.93,1267.37 245.49,1266.81 245.92,1266.81 272.57,1240.16 274.47,1240.16 381.87,1240.16 396.73,1255.02 396.73,1307.13 IC_MUX1.39 ; v1(665.35,1062.99) 665.7,1062.65 665.7,1054.77 727.43,993.04 763.05,993.04 778.62,993.03 FPC1.2
  Bottom Layer w10: v1(244.09,1267.72) 244.58,1267.72 272.14,1295.28 456.69,1295.28 665.35,1086.61 v1(665.35,1062.99)
MUX_COL_S32: FPC1.1 IC_MUX1.40 | length 935.8
  Top Layer w10: v1(244.09,1236.22) 255.91,1224.41 397.64,1224.41 416.42,1243.19 416.42,1307.13 IC_MUX1.40 ; v1(633.86,1062.99) 634.2,1062.65 634.2,1054.77 715.63,973.35 778.63,973.35 FPC1.1
  Bottom Layer w10: v1(244.09,1236.22) 279.53,1271.65 437.01,1271.65 633.86,1074.8 v1(633.86,1062.99)
MUX_ROW_IN: IC_MUX2.43 ROW.2 ROW.4 | length 1826.4
  Top Layer w11.81: IC_MUX2.43 476.85,1910.89 476.85,1873.54 535.43,1814.96 v2(602.36,1814.96)
  GND w19.68: ROW.4 ROW.2 429.13,460.63 551.18,582.68 551.18,1763.78 v2(602.36,1814.96)
MUX_ROW_S1: FPC1.64 IC_MUX2.12 | length 145.7
  Top Layer w10: IC_MUX2.12 FPC1.64
MUX_ROW_S2: FPC1.63 IC_MUX2.11 | length 145.7
  Top Layer w10: IC_MUX2.11 FPC1.63
MUX_ROW_S3: FPC1.62 IC_MUX2.10 | length 145.7
  Top Layer w10: IC_MUX2.10 FPC1.62
MUX_ROW_S4: FPC1.61 IC_MUX2.9 | length 145.7
  Top Layer w10: IC_MUX2.9 FPC1.61
MUX_ROW_S5: FPC1.60 IC_MUX2.8 | length 145.7
  Top Layer w10: IC_MUX2.8 FPC1.60
MUX_ROW_S6: FPC1.59 IC_MUX2.7 | length 145.7
  Top Layer w10: IC_MUX2.7 FPC1.59
MUX_ROW_S7: FPC1.58 IC_MUX2.6 | length 145.7
  Top Layer w10: IC_MUX2.6 FPC1.58
MUX_ROW_S8: FPC1.57 IC_MUX2.5 | length 145.7
  Top Layer w10: IC_MUX2.5 FPC1.57
MUX_ROW_S9: FPC1.56 IC_MUX2.4 | length 145.7
  Top Layer w10: IC_MUX2.4 FPC1.56
MUX_ROW_S10: FPC1.55 IC_MUX2.3 | length 145.7
  Top Layer w10: IC_MUX2.3 FPC1.55
MUX_ROW_S11: FPC1.54 IC_MUX2.2 | length 145.7
  Top Layer w10: IC_MUX2.2 FPC1.54
MUX_ROW_S12: FPC1.53 IC_MUX2.1 | length 145.7
  Top Layer w10: IC_MUX2.1 FPC1.53
MUX_ROW_S13: FPC1.52 IC_MUX2.48 | length 220.4
  Top Layer w10: IC_MUX2.48 614.17,1976.38 FPC1.52
MUX_ROW_S14: FPC1.51 IC_MUX2.47 | length 295.9
  Top Layer w10: IC_MUX2.47 555.69,1937.38 555.69,1895.62 561.55,1889.76 590.53,1889.76 650.81,1950.04 ; 650.83,1950.04 657.49,1956.7 FPC1.51
MUX_ROW_S15: FPC1.50 IC_MUX2.46 | length 332.1
  Top Layer w10: IC_MUX2.46 536.81,1936.57 536.81,1880.51 547.24,1870.08 598.43,1870.08 664.45,1936.11 778.63,1936.11 FPC1.50
MUX_ROW_S16: FPC1.49 IC_MUX2.45 | length 364.6
  Top Layer w10: IC_MUX2.45 517.13,1936.57 517.13,1872.64 539.37,1850.39 606.3,1850.39 672.32,1916.42 763.05,1916.42 778.62,1916.42 FPC1.49
MUX_ROW_S17: FPC1.48 IC_MUX2.25 | length 815.5
  Top Layer w10: v1(247,2219.09) 247.27,2219.09 253.76,2212.6 IC_MUX2.25 ; FPC1.48 811.02,1897.64 v1(826.77,1913.39)
  Bottom Layer w10: v1@247.35,2218.75 308.09,2158 582.16,2158 v1(826.77,1913.39)
MUX_ROW_S18: FPC1.47 IC_MUX2.26 | length 991.4
  Top Layer w10: v1(218,2204) 218.35,2203.65 218.35,2199.33 224.76,2192.91 IC_MUX2.26 ; FPC1.47 833.96,1877.96 854.65,1898.65 854.65,1899.16 860,1904.51 v1(860,1905)
  Bottom Layer w10: v1(218,2204) 218,2204.49 217,2205.49 217,2222 235,2240 265,2240 327,2178 591.72,2178 859.65,1910.07 v1@859.65,1905.35
MUX_ROW_S19: FPC1.46 IC_MUX2.27 | length 1152.3
  Top Layer w10: v1(191,2187) 204.77,2173.23 IC_MUX2.27 ; FPC1.46 780.43,1859.17 FPC1.46@796,1859.17 ; FPC1.46@796.01,1859.18 852.18,1859.18 v1(892,1899)
  Bottom Layer w10: v1(191,2187) 191,2226 224,2259 284,2259 346,2197 603,2197 891.72,1908.28 891.72,1899.28 v1(892,1899)
MUX_ROW_S20: FPC1.45 IC_MUX2.28 | length 1303.6
  Top Layer w10: v1(164,2169) 178.55,2154.45 299.25,2154.45 IC_MUX2.28 ; FPC1.45 867.59,1838.59 v1@919.65,1890.65
  Bottom Layer w10: v1@164,2169.49 164,2227 212,2275 296,2275 356,2215 607.83,2215 920,1902.83 v1(920,1891)
MUX_ROW_S21: FPC1.44 IC_MUX2.29 | length 1451.7
  Top Layer w10: v1(140,2149) 140.49,2149 154.73,2134.76 299.25,2134.76 IC_MUX2.29 ; FPC1.44 881.9,1818.9 v1(949,1886)
  Bottom Layer w10: v1@140,2149.49 140,2228 203,2291 312,2291 372,2231 615.38,2231 870.28,1976.1 949,1897.38 v1(949,1886)
MUX_ROW_S22: FPC1.43 IC_MUX2.30 | length 1609.2
  Top Layer w10: v1(113,2125) 123.83,2114.17 IC_MUX2.30 ; FPC1.43 901.22,1799.22 v1(976,1874)
  Bottom Layer w10: v1(113,2125) 113,2203 120,2210 120,2234 194,2308 322,2308 381,2249 621.08,2249 976,1894.08 v1(976,1874)
MUX_ROW_S23: FPC1.42 IC_MUX2.31 | length 1773.4
  Top Layer w10: v1(89,2102) 96.51,2094.49 IC_MUX2.31 ; FPC1.42 910.82,1779.53 983.29,1852 v1(1007,1852)
  Bottom Layer w10: v1(89,2102) 89,2206.26 103,2220.26 103,2244 184,2325 334,2325 391,2268 625.7,2268 1007,1886.7 v1(1007,1852)
MUX_ROW_S24: FPC1.41 IC_MUX2.32 | length 2004.9
  Top Layer w10: v1(65,2081) 65.49,2081 70.78,2075.71 271.38,2075.71 299.25,2075.71 IC_MUX2.32 ; FPC1.41 913.85,1759.85 982,1828 v1(1031,1828)
  Bottom Layer w10: v1(65,2081) 42,2104 42,2308 77,2343 343.97,2343 400.97,2286 631.32,2286 977,1940.32 1031,1886.32 v1(1031,1828)
MUX_ROW_S25: FPC1.40 IC_MUX2.33 | length 1338
  Top Layer w10: v1@173.54,2055.12 IC_MUX2.33 ; FPC1.40 916.1,1740.16 972.95,1797 v1(1013,1797)
  Bottom Layer w10: v1(173.23,2054.8) 173.72,2054.8 177.97,2059.06 651.54,2059.06 710.59,2000 915.32,1795.28 970.73,1795.28 975.89,1800.43 1009.08,1800.43 1012.51,1797 v1(1013,1797)
MUX_ROW_S26: FPC1.39 IC_MUX2.34 | length 1263.2
  Top Layer w10: v1(173.23,2022.4) 186.26,2035.43 IC_MUX2.34 ; FPC1.39 927.27,1720.48 975.87,1769.07 975.87,1769.87 976.77,1770.77 v1(976.77,1771.26)
  Bottom Layer w10: v1(173.23,2022.4) 173.72,2022.4 178.88,2027.56 663.32,2027.56 919.23,1771.65 975.1,1771.65 975.14,1771.61 976.42,1771.61 v1(976.77,1771.26)
MUX_ROW_S27: FPC1.38 IC_MUX2.35 | length 1257.7
  Top Layer w10: v1(173.23,1992.13) 188.98,1992.13 213.5,2016.65 271.38,2016.65 299.25,2016.65 IC_MUX2.35 ; FPC1.38 937.14,1700.79 v1@976.03,1739.68
  Bottom Layer w10: v1(173.23,1992.13) 679.05,1992.13 931.15,1740.02 v1(976.38,1740.02)
MUX_ROW_S28: FPC1.37 IC_MUX2.36 | length 1267.1
  Top Layer w10: v1(173.23,1960.63) 267.72,1960.63 287.4,1980.32 287.4,1995.16 288.31,1996.06 IC_MUX2.36 ; FPC1.37 948.82,1681.11 975.03,1707.31 977.03,1707.31 v1@977.38,1707.66
  Bottom Layer w10: v1@173.72,1960.63 685.04,1960.63 938.01,1707.66 v1@976.89,1707.66
  other v1: 976.38,1707.66
MUX_ROW_S29: FPC1.36 IC_MUX2.37 | length 1254.9
  Top Layer w10: v1(173.23,1933.07) 357.83,1933.07 358.74,1933.98 IC_MUX2.37 ; FPC1.36 780.43,1660.52 857.92,1660.52 858.24,1660.2 v1@948.33,1660.2
  Bottom Layer w10: v1(173.23,1933.07) 688.98,1933.07 948.82,1673.23 v1(948.82,1660.2)
MUX_ROW_S30: FPC1.35 IC_MUX2.38 | length 1271.1
  Top Layer w10: v1(173.23,1901.57) 341.5,1901.57 347.5,1895.57 369.98,1895.57 377.52,1903.11 377.52,1936.57 IC_MUX2.38 ; FPC1.35 780.43,1640.83 796,1640.83 914.29,1640.83 v1(921.26,1633.86)
  Bottom Layer w10: v1(173.23,1901.57) 692.91,1901.57 921.26,1673.23 v1@921.26,1634.35
MUX_ROW_S31: FPC1.34 IC_MUX2.39 | length 1266.8
  Top Layer w10: v1(173.23,1870.08) 381.87,1870.08 397.2,1885.42 397.2,1936.57 IC_MUX2.39 ; FPC1.34 881.89,1622.05 v1(893.7,1610.24)
  Bottom Layer w10: v1(173.23,1870.08) 696.85,1870.08 893.35,1673.57 893.35,1610.58 v1(893.7,1610.24)
MUX_ROW_S32: FPC1.33 IC_MUX2.40 | length 1261.9
  Top Layer w10: v1(172,1837) 380.31,1837 416.89,1873.58 416.89,1936.57 IC_MUX2.40 ; FPC1.33 780.43,1601.46 831.61,1601.46 v1(854.33,1578.74)
  Bottom Layer w10: v1(172,1837) 172.49,1837 177.03,1841.54 693.89,1841.54 854.33,1681.1 v1(854.33,1578.74)
NetIC1_3: IC1.3 R1.1 R2.2 | length 337
  Top Layer w10: R1.1@147.64,192.68 147.64,188.98 136.89,178.23 133.19,178.23 111.41,156.45 111.41,69.7 135.83,45.28 IC1.3 ; R1.1 158.39,203.66 158.39,211.54 206.69,259.84 R2.2
NetIC1_4: IC1.4 R5.1 R6.1 | length 211.9
  Top Layer w10: IC1.4 409.45,45.28 R5.1 415.35,55.12 463.66,103.43 463.66,111.3 R6.1
NetIC2_7: IC2.7 IC2.8 IC2.9 | length 223.7
  Top Layer w10: IC2.7 IC2.8 424.21,526.57 417.32,519.68 417.32,476.38 440.94,452.76 484.38,452.76 490.24,458.61 490.24,486.3 IC2.9
Sensor_OUT_1: ADC.1 IC2.10 | length 194.6
  Top Layer w10: IC2.10 517.72,435.04 552.24,400.51 607.36,400.51 ADC.1
Vref_SELECT: IC2.6 Vref.2 Vref.4 | length 381.9
  Top Layer w11.81: v2(393.7,562.99) 408.46,577.76 IC2.6
  Bottom Layer w19.68: v2(393.7,562.99) 437.01,606.3 437.01,723.9 436.24,724.67 436.24,748.8 Vref.4 Vref.2
WR01: IC_MUX2.21 J1.07 | length 1726.7
  Top Layer w10: IC_MUX2.21 417.8,2108.2 v2(418,2108)
  POwer w10: J1.07 318.9,1107.87 318.9,1602.36 232.28,1688.98 232.28,2035.43 304.85,2108 v2(418,2108)
WR02: IC_MUX1.21 J1.06 | length 1058.8
  Top Layer w10: v1(417.32,1574.8) IC_MUX1.21
  GND w10: J1.06 417.32,1106.3 v1(417.32,1574.8)
pads on no net: FPC1.65 FPC1.66 IC2.1 IC2.4 IC2.17 IC_MUX1.41 IC_MUX1.42 IC_MUX1.44 IC_MUX2.41 IC_MUX2.42 IC_MUX2.44 J1.01 J1.02 J1.05 J1.08 J1.14 J1.16 J1.18 J?1.2 J?1.6 J?1.7 J?1.8 J?1.10 J?1.11 J?1.14 VR1.1

## Polygon pours and split planes (outlines as drawn)
GND on GND "GND_L02_P003" (solid, remove dead copper, pour order 3): 6.89,2358 1089,2358 1089,11.18 1085.18,15 3.68,15

## Silkscreen, mask and mechanical layers (free items; w line width, h text height)
Top Overlay:
  drawing of 4 lines, arcs and shapes, not listed
  text "MUX_ver1" at 979.8,823.19 h62.99 r270
Mechanical 1:
  the board outline again, w3.94

## Dimensions
47.24,236.22 to 952.76,236.22 on Mechanical 13

## Text inside footprints (layer, text, board x,y; h text height)
ADC: Top Overlay "1" at 558,368 h23.62; Top Overlay "2" at 554,238 h23.62
COL: Top Overlay "1" at 561,870 h23.62; Top Overlay "2" at 558,729 h23.62
ROW: Top Overlay "2" at 246,234 h23.62; Top Overlay "1" at 249,371 h23.62
Vref: Top Overlay "1.65V" at 157,778 h23.62; Top Overlay "GND" at 196,845 h23.62